# Altium PCB MB.PcbDoc (part 1 of 3)
Units mil, origin at the board's own origin, x right, y up, seen from the top; angles counter-clockwise.
Board outline 5718.69 x 3947.04 mil, 2 copper layers (Top Layer, Bottom Layer); 146 components, 154 nets, 660 pads, 249 vias.
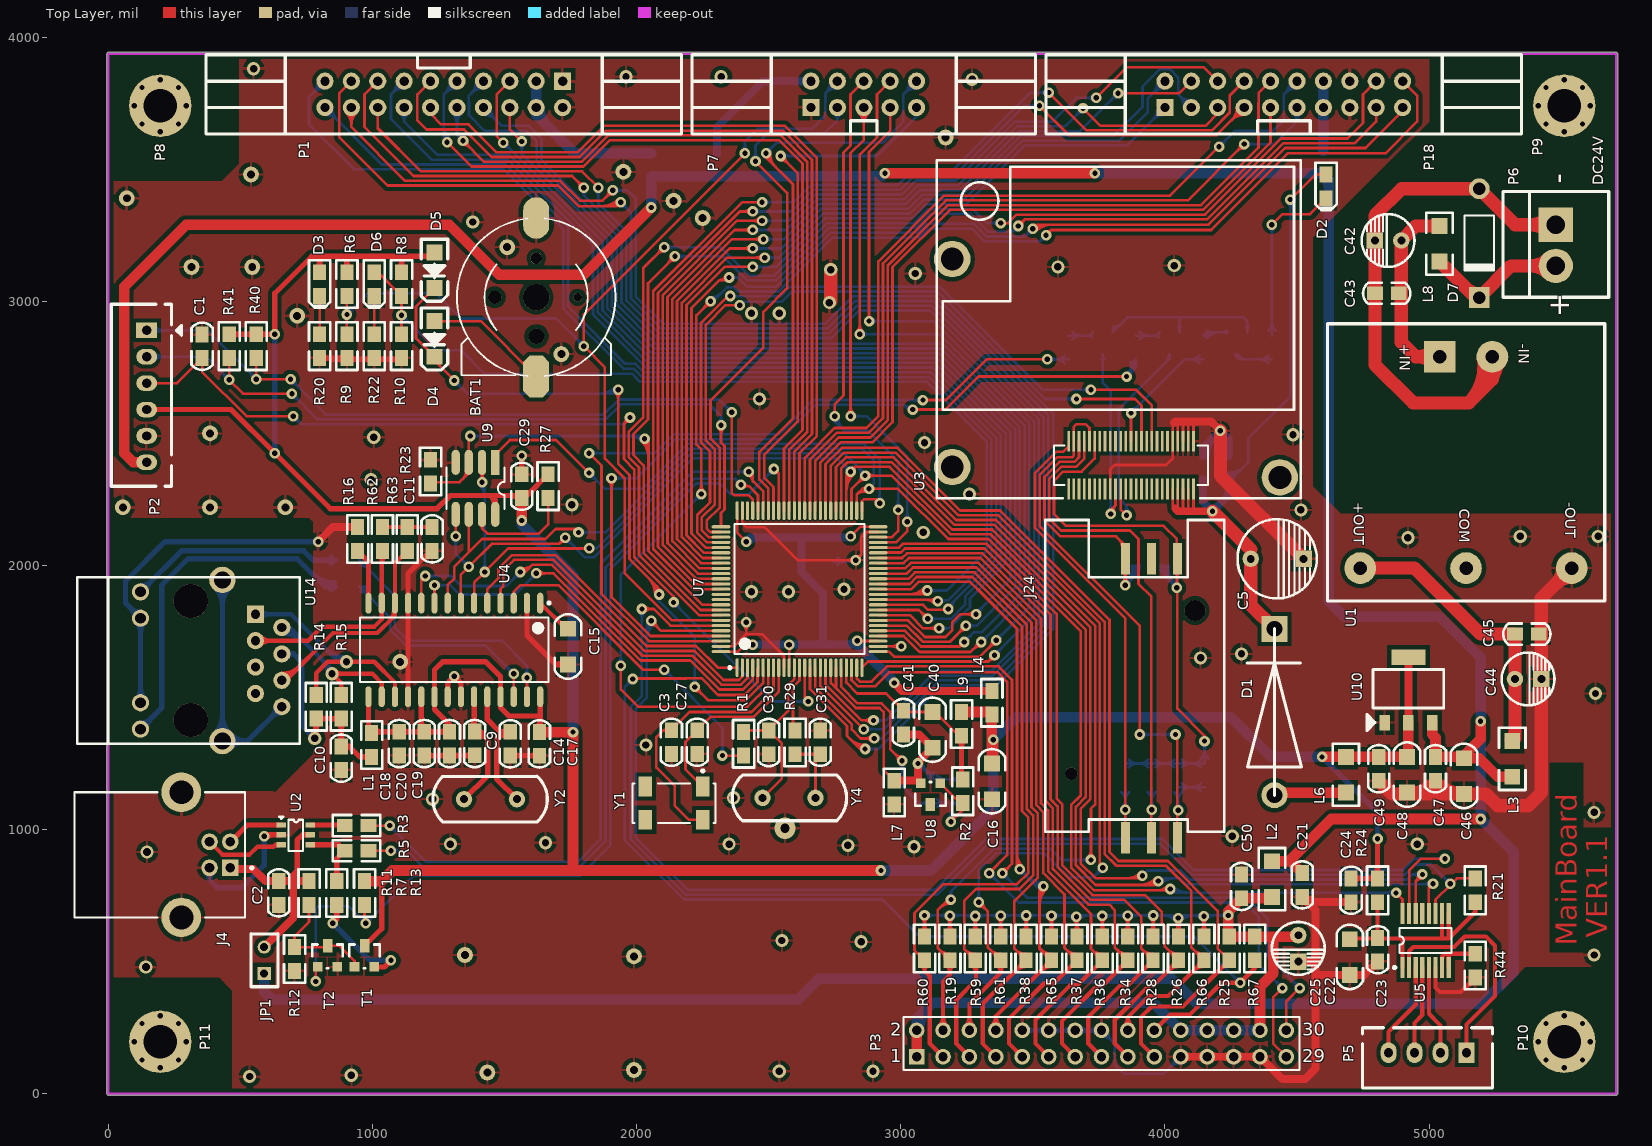
[diagram p0: Top Layer view]
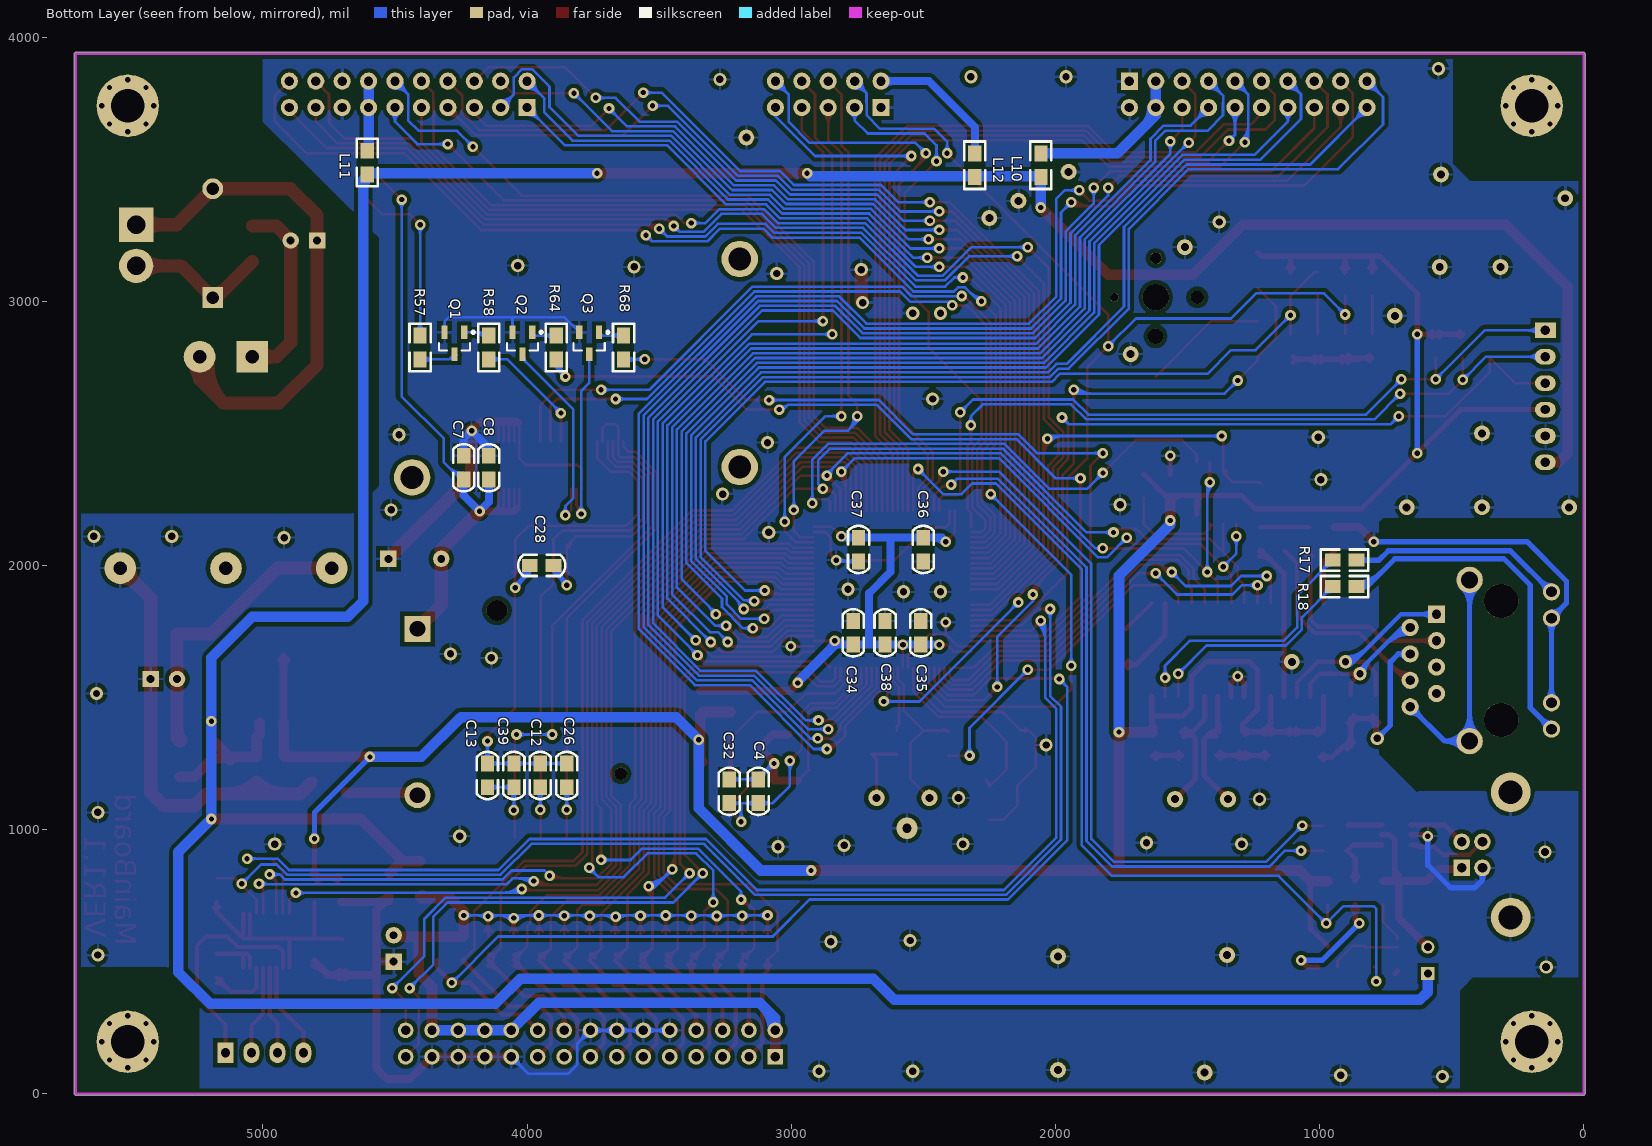
[diagram p1: Bottom Layer view, seen from below]

## Layer stack, top to bottom
Top Layer: signal copper 1.4
Dielectric: dielectric 12.6, FR-4, Dk 4.8
Bottom Layer: signal copper 1.4

## Board outline
-5.01,0 ccw(c0,0) 0,-5.01 5708.66,-5.01 ccw(c5708.66,0) 5713.68,0 5713.68,3937.01 ccw(c5708.66,3937.01) 5708.66,3942.02 0,3942.02 ccw(c0,3937.01) -5.01,3937.01

## Design rules (kind name [scope] priority, off if disabled: settings)
Clearance Clearance_1 [(InComponent('U7') AND HasFootprint('LQFP100_N'))] p1: gap=6
Clearance Clearance_2 [IsRegion] p2: gap=16
Clearance [All] p3: gap=8
ComponentClearance [All] p1: gap=0 collisioncheckmode=3 verticalgap=10 showdistances=FALSE
PolygonConnect [All] p1: connectstyle=Relief reliefconductorwidth=10 reliefentries=4 polygonreliefangle="90 Angle"
RoomDefinition POWER [InComponentClass('POWER')] p1 off: confinementstyle=ConfineIn formatcopy=TRUE lockcomponents=FALSE outline 618.67,3195.12 5382.45,3195.12 5382.45,3943.15 618.67,3943.15
RoomDefinition stm32 [InComponentClass('stm32')] p2 off: confinementstyle=ConfineIn formatcopy=TRUE lockcomponents=FALSE outline 1732.25,885.83 3931.89,885.83 3931.89,3665.04 1732.25,3665.04
RoomDefinition lcd_key_led [InComponentClass('lcd_key_led')] p3 off: confinementstyle=ConfineIn formatcopy=TRUE lockcomponents=FALSE outline 3917.29,866.14 5669.29,866.14 5669.29,2893.68 3917.29,2893.68
RoomDefinition EtherNet [InComponentClass('EtherNet')] p4 off: confinementstyle=ConfineIn formatcopy=TRUE lockcomponents=FALSE outline 492.09,2795.28 1751.97,2795.28 1751.97,3917.31 492.09,3917.31
RoomDefinition GSM [InComponentClass('GSM')] p5: confinementstyle=ConfineIn formatcopy=TRUE lockcomponents=FALSE outline 3120.1,2243.71 3120.1,3541.02 4520.9,3541.02 4520.9,3532 4657,3532 4657,1452 4712,1452 4712,1203 4525.36,1203 4525.36,1074.87 4231.02,1074.87 4231.02,903.88 3539.85,903.88 3539.85,2243.71
RoutingVias [All] p1: holewidth=28 width=40 viastyle="Through Hole" minholewidth=20 minwidth=40 maxholewidth=20 maxwidth=50
SilkscreenOverComponentPads [All] p1: minsilkscreentomaskgap=10
SolderMaskExpansion [All] p1: expansion=4
Width [All] p1: maxlimit=100 minlimit=10 preferedwidth=10
26 further rules are at their usual default settings.

## Classes and differential pairs
component class EtherNet: C9 C10 C11 C14 C15 C16 C17 C18 C19 C20 L1 R1 R14 R15 R16 R17 R18 R62 R63 U4 U14 Y2
component class GSM: C5 C7 C8 C12 C13 C26 C28 C39 D1 D2 J24 L6 Q1 Q2 Q3 R57 R58 R64 R68 U3
component class lcd_key_led: C2 C21 C22 C23 C24 C25 C50 D3 D6 J4 JP1 L2 P3 P5 R3 R5 R7 R11 R12 R13 R19 R20 R21 R22 R24 R25 R26 R28 R34 R36 R37 R38 R44 R59 R60 R61 R65 R66 R67 T1 T2 U2 U5
component class POWER: C42 C43 C44 C45 C46 C47 C48 C49 D7 L3 L8 P6 P8 P9 P10 P11 U1 U10
component class stm32: BAT1 C1 C3 C4 C27 C29 C30 C31 C32 C34 C35 C36 C37 C38 C40 C41 D4 D5 L4 L7 L9 L10 L11 L12 P1 P2 P7 P18 R2 R6 R8 R9 R10 R23 R27 R29 R40 R41 U7 U8 U9 Y1 Y4

## Components (designator, comment, footprint, x,y, rotation, side; value= is the part's Value field where it differs from the comment)
BAT1 "3V" battery 1620,2715 r180 top
C1 "100nF" C0805 355,2874.83 r270 top
C2 "100nF" C0805 645,715 r90 top
C3 "10pF" C0805 2131.89,1376.04 r270 top
C4 "100nF" C0805 3125,1190 r270 bottom
C5 "470uF/16V" CD2/3 4525,2025 r270 top
C7 "100nF" C0805 4240,2415 r270 bottom
C8 "100nF" C0805 4145,2415 r270 bottom
C9 "22pF" C0805 1386.89,1371.04 r270 top
C10 "100nF" C0805 881.89,1225.04 r90 top
C11 "10nF" C0805 1225.89,2055.04 r90 top
C12 "1nF" C0805 3950,1250 r270 bottom
C13 "100nF" C0805 4150,1250 r270 bottom
C14 "22pF" C0805 1521.89,1370.04 r270 top
C15 "10uF" C1206 1740,1625 r90 top
C16 "10uF" C1206 3345,1115 r90 top
C17 "100nF" C0805 1631.89,1279.21 r90 top
C18 "100nF" C0805 1101.14,1280.21 r90 top
C19 "100nF" C0805 1291.64,1280.21 r90 top
C20 "100nF" C0805 1196.39,1280.21 r90 top
C21 "100nF" C0805 4520,745 r90 top
C22 "10uF" C1206 4700,450 r90 top
C23 "100nF" C0805 4805,500 r90 top
C24 "100nF" C0805 4705,725 r90 top
C25 "47uF/16V" CD1/2 4505,500 r180 top
C26 "22pF" C0805 3850,1250 r270 bottom
C27 "10pF" C0805 2229.22,1376.04 r270 top
C28 "22pF" C0805 3990,2000 r180 bottom
C29 "100nF" C0805 1565,2345 r270 top
C30 "22pF" C0805 2500,1375 r270 top
C31 "22pF" C0805 2695,1285 r90 top
C32 "100nF" C0805 3235,1190 r270 bottom
C34 "100nF" C0805 2765,1790 r270 bottom
C35 "100nF" C0805 2510,1790 r270 bottom
C36 "100nF" C0805 2500,2015 r90 bottom
C37 "100nF" C0805 2745,2015 r90 bottom
C38 "100nF" C0805 2645,1790 r270 bottom
C39 "22pF" C0805 4050,1250 r270 bottom
C40 "10uF" C1206 3120,1310 r90 top
C41 "10nF" C0805 3010,1360 r90 top
C42 "47uF/50V" CD1/2 4795,3230 r90 top
C43 "100nF" C0805 4885,3030 r180 top
C44 "47uF/16V" CD1/2 5425,1570 r270 top
C45 "100nF" C0805 5325,1740 r0 top
C46 "10uF" C1206 5131.89,1135.04 r90 top
C47 "100nF" C0805 5024.39,1185.04 r90 top
C48 "10uF" C1206 4916.89,1140.04 r90 top
C49 "100nF" C0805 4809.39,1185.04 r90 top
C50 "100nF" C0805 4290,830 r270 top
D1 "1N5822" V5 4415,1130.08 r90 top
D2 "LED" LED0805#1 4610,3480 r270 top
D3 "POWER" LED0805#2 800,3020 r270 top
D4 "LL4148" D1206 1235,2925 r270 top
D5 "LL4148" D1206 1235,3185 r270 top
D6 "WORK" LED0805#2 1006.67,3020 r270 top
D7 "1N4007" DO-41 5190,3220 r270 top
J4 "USB-B" USB-B 461.89,855.04 r180 top
J24 "SIM" IC-CARD2 4046.85,968.94 r90 top
JP1 "" SIP2 590,455 r90 top
L1 "BLM21PG331SN1" L0805 996.89,1365.04 r270 top
L2 "BLM31PG601SN1" l1206 4405,745 r90 top
L3 "BLM31PG601SN1" L1206 5315,1200 r90 top
L4 "BLM21PG331SN1" L0805 3345,1435 r90 top
L6 "BLM31PG601SN1" L1206 4685,1275 r270 top
L7 "BLM21PG331SN1" L0805 2975,1095 r90 top
L8 "BLM31PG601SN1" L1206 5040,3285 r270 top
L9 "BLM21PG331SN1" L0805 3230,1445 r270 top
L10 "BLM21PG331SN1" L0805 2055,3470 r90 bottom
L11 "BLM21PG331SN1" L0805 4605,3480 r90 bottom
L12 "BLM21PG331SN1" L0805 2305,3470 r90 bottom
P1 "HV_CTRL" IDC20-EJ 1720,3833.15 r180 top
P2 "Header 6" TJC3-6A 145,2890 r270 top
P3 "LCD NH056DN03" HDR2X15 3060,140 r0 top
P5 "Touch Screen" TJC3-4A 5141.89,155.04 r180 top
P6 "24V" 3.96-2 5480,3290 r90 top
P7 "USART" IDC10-EJ 2660,3733.15 r0 top
P8 "Header 9" lk 196.85,3740.16 r0 top
P9 "Header 9" lk 5511.81,3740.16 r0 top
P10 "Header 9" lk 5511.81,196.85 r0 top
P11 "Header 9" lk 196.85,196.85 r0 top
P18 "RELAY" IDC20-EJ 4000,3733.15 r0 top
Q1 "MMBT3904" SOT23_N 4275,2841.34 r270 bottom
Q2 "MMBT3904" SOT23_N 4017.6,2841.26 r270 bottom
Q3 "MMBT3904" SOT23_N 3765,2841.26 r270 bottom
R1 "0R" R0805 2405,1370 r270 top
R2 "1K" R0805 3235,1190 r270 top
R3 "0R" R0805 985,1015 r180 top
R5 "0R" R0805 985,920 r180 top
R6 "NI" R0805 903.33,3110 r270 top
R7 "1.5K" R0805 865,805 r270 top
R8 "NI" R0805 1110,3110 r270 top
R9 "100K" R0805 903.33,2875 r270 top
R10 "1K" R0805 1110,2875 r270 top
R11 "10K" R0805 760,715 r90 top
R12 "36K" R0805 705,465 r90 top
R13 "36K" R0805 970,715 r90 top
R14 "49.9/1%" R0805 786.89,1420.04 r90 top
R15 "49.9/1%" R0805 881.89,1420.04 r90 top
R16 "2K/1%" R0805 943.89,2145.04 r270 top
R17 "390" R0805 860,2020 r0 bottom
R18 "390" R0805 860,1920 r0 bottom
R19 "5.1K" R0805 3186.15,595 r270 top
R20 "1K" R0805 800,2875 r270 top
R21 "100K" R0805 5175,815 r270 top
R22 "1K" R0805 1006.67,2875 r270 top
R23 "10K" R0805 1220,2310 r90 top
R24 "100" R0805 4805,725 r90 top
R25 "5.1K" R0805 4243.85,595 r270 top
R26 "5.1K" R0805 4051.54,595 r270 top
R27 "10K" R0805 1665,2255 r90 top
R28 "5.1K" R0805 3955.38,595 r270 top
R29 "390" R0805 2600,1375 r270 top
R34 "5.1K" R0805 3859.23,595 r270 top
R36 "5.1K" R0805 3763.08,595 r270 top
R37 "5.1K" R0805 3666.92,595 r270 top
R38 "5.1K" R0805 3474.62,595 r270 top
R40 "100K" R0805 560,2785 r90 top
R41 "100K" R0805 457.5,2785 r90 top
R44 "1K" R0805 5175,440 r90 top
R57 "3.3K" R0805 4405,2780 r90 bottom
R58 "10K" R0805 4145,2780 r90 bottom
R59 "5.1K" R0805 3282.31,595 r270 top
R60 "5.1K" R0805 3090,595 r270 top
R61 "5.1K" R0805 3378.46,595 r270 top
R62 "49.9/1%" R0805 1037.89,2145.04 r270 top
R63 "49.9/1%" R0805 1131.89,2145.04 r270 top
R64 "10K" R0805 3890,2780 r90 bottom
R65 "5.1K" R0805 3570.77,595 r270 top
R66 "5.1K" R0805 4147.69,595 r270 top
R67 "5.1K" R0805 4340,595 r270 top
R68 "10K" R0805 3635,2780 r90 bottom
T1 "MMBT3904" SOT-23 932,480 r0 top
T2 "MMBT3904" SOT-23 792,480 r0 top
U1 "MORNSUN PWB2405YMD-6W" DC/DC-1X1 5040,2790 r270 top
U2 "USBLC6-2SC6" SOT-23/6 654.76,1017.4 r0 top
U3 "MC37I" MC37I 3635.56,2470.19 r90 top locked
U4 "ENC28J60-I/SO" SOIC-SO28_L 1309.84,1680.08 r270 top
U5 "ADS7843E" DBQ016 4986.89,580.04 r0 top
U7 "STM32F103VBT6" LQFP100_N 2616.89,1910.04 r90 top
U8 "LM4040BIM3-2.5/SOT23" SOT-23 3150,1175 r180 top
U9 "M25P40VMN6T" SO8 1465,2390 r270 top
U10 "LM1117MPX-3.3" SOT-223 4921.89,1405.04 r0 top
U14 "HR911105A" HANRUN-A8 311.89,1865.04 r270 top
Y1 "32.768KHz" DSO-N4 2141.89,1100.04 r180 top
Y2 "25MHz" CRYSTAL2 1346.89,1115.04 r0 top
Y4 "8MHz" CRYSTAL2 2676.89,1120.04 r180 top

## Footprints (in the part's own frame and the unit in brackets; to place one, negate y for a bottom-side part, rotate by r counter-clockwise, add the part's x,y. Pads: shape width x height; smd on the part's side, far side on the other; paste and mask are expansions set on the pad)
3.96-2 [mil]
  rect 130x130 hole 70: 1(0,0)
  round 130 hole 70: 2(-156,0)
  silkscreen extent -275,-200 125,200
battery [mm]
  round 0.813 hole 0.813: 0(-3.988,-7.62)
  round 1.5 hole 1.5: 0(-0.025,-3.87)
  round 2.54 hole 2.54: 0(0,-7.62)
  round 1.1 hole 1.1: 0(0,-11.37)
  round 1.27 hole 1.27: 0(3.988,-7.62)
  oct 2.5x4 smd: 1(0,0)
  oval 2.5x4 smd: 2(0,-15.24)
  silkscreen extent -7.62,-15.19 7.62,-0.05
C0805 [mil]
  rect 60x50 smd: 1(0,0) 2(90,0)
  silkscreen extent -44,-40 135,40
C1206 [mil]
  rect 60x60 smd: 1(0,0) 2(135,0)
  silkscreen extent -54,-50 190,50
CD1/2 [mil]
  round 62 hole 30: 1(0,-100)
  rect 62x62 hole 30: 2(0,0)
  silkscreen extent -100,-150 100,50
CD2/3 [mil]
  round 62 hole 30: 1(0,-200)
  rect 62x62 hole 30: 2(0,0)
  silkscreen extent -150,-250 150,50
CRYSTAL2 [mil]
  round 62 hole 30: 1(0,0) 2(200,0)
  silkscreen extent -118,-87 315,87
D1206 [mil]
  rect 60x60 smd: 1(0,0) 2(135,0)
  silkscreen extent -50,-50 185,50
DBQ016 [mm] "SSOP; 16 Leads; Body Width 3.9 mm; Pitch 0.635 mm"
  rect 0.4x2 smd: 1(-2.222,-2.6) 2(-1.587,-2.6) 3(-0.953,-2.6) 4(-0.318,-2.6) 5(0.318,-2.6) 6(0.953,-2.6) 7(1.587,-2.6) 8(2.222,-2.6) 9(2.222,2.6) 10(1.587,2.6) 11(0.953,2.6) 12(0.318,2.6) 13(-0.318,2.6) 14(-0.953,2.6) 15(-1.587,2.6) 16(-2.222,2.6)
  silkscreen extent -3.1,-2.72 2.5,1.2
DC/DC-1X1 [mil]
  rect 120x120 hole 51: 1(0,0)
  round 120 hole 51: 2(0,200) 3(800,500) 4(800,100) 5(800,-300)
  silkscreen extent -125,-425 925,625
DO-41 [mm] "Diode, Axial; Body 5.2 x 2.7 mm (LxDia. max), Lead Dia. 0.86 mm (max)"
  round 2 hole 1.2: 1(-5.23,0)
  rect 2x2 hole 1.2: 2(5.23,0)
  silkscreen extent -2.65,-1.4 2.75,1.4
DSO-N4 [mm] "Crystal, SM; 4 Leads; Body 8 x 3.8 x 2.5 mm (LxWxH)"
  rect 1.3x1.9 smd: 1(-2.75,-1.6) 2(2.75,-1.6) 3(2.75,1.6) 4(-2.75,1.6)
  silkscreen extent -4,-3.22 4,1.9
HANRUN-A8 [mil]
  rect 65x65 hole 35: 1(50,245)
  round 65 hole 35: 2(100,345) 3(150,245) 4(200,345) 5(250,245) 6(300,345) 7(350,245) 8(400,345)
  round 65 hole 40: 9(-35.04,-189.92) 10(64.96,-189.92) 11(384.96,-189.92) 12(484.96,-189.92)
  round 100 hole 65: 13(-80,120) 14(530,120)
  round 130 hole 130: A(0,0) B(450,0)
  silkscreen extent -90,-430 540,413
HDR2X15 [mm] "Connector; Header; 15x2 Position"
  rect 1.5x1.5 hole 0.9: 1(0,0)
  round 1.5 hole 0.9: 2(0,2.54) 3(2.54,0) 4(2.54,2.54) 5(5.08,0) 6(5.08,2.54) 7(7.62,0) 8(7.62,2.54) 9(10.16,0) 10(10.16,2.54) 11(12.7,0) 12(12.7,2.54) 13(15.24,0) 14(15.24,2.54) 15(17.78,0) 16(17.78,2.54) 17(20.32,0) 18(20.32,2.54) 19(22.86,0) 20(22.86,2.54) 21(25.4,0) 22(25.4,2.54) 23(27.94,0) 24(27.94,2.54) 25(30.48,0) 26(30.48,2.54) 27(33.02,0) 28(33.02,2.54) 29(35.56,0) 30(35.56,2.54)
  silkscreen extent -1.27,-1.27 36.83,3.81
IC-CARD2 [mm]
  round 1.2 hole 1.2: 0(6.162,10.2)
  round 2 hole 2: 0(21.862,-1.7)
  rect 3x0.864 smd: 1(0,0) 2(0,2.5) 3(0,5) 4(26.824,0) 5(26.824,2.5) 6(26.824,5)
  silkscreen extent 0.56,-4.5 30.56,12.7
IDC10-EJ [mil]
  rect 65x65 hole 35: 1(0,0)
  round 65 hole 35: 2(0,100) 3(100,0) 4(100,100) 5(200,0) 6(200,100) 7(300,0) 8(300,100) 9(400,0) 10(400,100)
  silkscreen extent -450,-100 850,200
IDC20-EJ [mil]
  rect 65x65 hole 35: 1(0,0)
  round 65 hole 35: 2(0,100) 3(100,0) 4(100,100) 5(200,0) 6(200,100) 7(300,0) 8(300,100) 9(400,0) 10(400,100) 11(500,0) 12(500,100) 13(600,0) 14(600,100) 15(700,0) 16(700,100) 17(800,0) 18(800,100) 19(900,0) 20(900,100)
  silkscreen extent -450,-100 1350,200
L0805 [mil]
  rect 60x50 smd: 1(0,0) 2(90,0)
  silkscreen extent -45,-40 135,40
l1206 [mil]
  rect 60x60 smd: 1(0,0) 2(135,0)
  silkscreen extent -50,-50 185,50
L1206 [mil]
  rect 60x60 smd: 1(0,0) 2(135,0)
  silkscreen extent -50,-50 185,50
LED0805#1 [mil]
  rect 60x50 smd: 1(0,0) 2(90,0)
  silkscreen extent -45,-40 135,40
LED0805#2 [mil]
  rect 60x50 smd: 1(-90,0) 2(0,0)
  silkscreen extent -135,-40 45,40
lk [mm]
  round 6 hole 3.2: 1(0,0)
  round 1 hole 0.5: 2(-2.5,0) 3(0,2.5) 4(2.5,0) 5(0,-2.5) 6(-1.75,-1.75) 7(1.75,-1.75) 8(1.75,1.75) 9(-1.75,1.75)
LQFP100_N [mm] "Thin QFP, 100-Leads, Body 14x14mm, Pitch 0.5mm, IPC Medium Density"
  oval 1.8x0.3 smd: 1(-7.55,6) 2(-7.55,5.5) 3(-7.55,5) 4(-7.55,4.5) 5(-7.55,4) 6(-7.55,3.5) 7(-7.55,3) 8(-7.55,2.5) 9(-7.55,2) 10(-7.55,1.5) 11(-7.55,1) 12(-7.55,0.5) 13(-7.55,0) 14(-7.55,-0.5) 15(-7.55,-1) 16(-7.55,-1.5) 17(-7.55,-2) 18(-7.55,-2.5) 19(-7.55,-3) 20(-7.55,-3.5) 21(-7.55,-4) 22(-7.55,-4.5) 23(-7.55,-5) 24(-7.55,-5.5) 25(-7.55,-6) 51(7.55,-6) 52(7.55,-5.5) 53(7.55,-5) 54(7.55,-4.5) 55(7.55,-4) 56(7.55,-3.5) 57(7.55,-3) 58(7.55,-2.5) 59(7.55,-2) 60(7.55,-1.5) 61(7.55,-1) 62(7.55,-0.5) 63(7.55,0) 64(7.55,0.5) 65(7.55,1) 66(7.55,1.5) 67(7.55,2) 68(7.55,2.5) 69(7.55,3) 70(7.55,3.5) 71(7.55,4) 72(7.55,4.5) 73(7.55,5) 74(7.55,5.5) 75(7.55,6)
  oval 0.3x1.8 smd: 26(-6,-7.55) 27(-5.5,-7.55) 28(-5,-7.55) 29(-4.5,-7.55) 30(-4,-7.55) 31(-3.5,-7.55) 32(-3,-7.55) 33(-2.5,-7.55) 34(-2,-7.55) 35(-1.5,-7.55) 36(-1,-7.55) 37(-0.5,-7.55) 38(0,-7.55) 39(0.5,-7.55) 40(1,-7.55) 41(1.5,-7.55) 42(2,-7.55) 43(2.5,-7.55) 44(3,-7.55) 45(3.5,-7.55) 46(4,-7.55) 47(4.5,-7.55) 48(5,-7.55) 49(5.5,-7.55) 50(6,-7.55) 76(6,7.55) 77(5.5,7.55) 78(5,7.55) 79(4.5,7.55) 80(4,7.55) 81(3.5,7.55) 82(3,7.55) 83(2.5,7.55) 84(2,7.55) 85(1.5,7.55) 86(1,7.55) 87(0.5,7.55) 88(0,7.55) 89(-0.5,7.55) 90(-1,7.55) 91(-1.5,7.55) 92(-2,7.55) 93(-2.5,7.55) 94(-3,7.55) 95(-3.5,7.55) 96(-4,7.55) 97(-4.5,7.55) 98(-5,7.55) 99(-5.5,7.55) 100(-6,7.55)
  silkscreen extent -7.67,-6.25 6.25,6.82, body extent -7,-7 7,7, height 1.6
MC37I [mm]
  rect 2x0.254 smd: 1(0,0) 2(0,-0.5) 3(0,-1) 4(0,-1.5) 5(0,-2) 6(0,-2.5) 7(0,-3) 8(0,-3.5) 9(0,-4) 10(0,-4.5) 11(0,-5) 12(0,-5.5) 13(0,-6) 14(0,-6.5) 15(0,-7) 16(0,-7.5) 17(0,-8) 18(0,-8.5) 19(0,-9) 20(0,-9.5) 21(0,-10) 22(0,-10.5) 23(0,-11) 24(0,-11.5) 25(0,-12) 26(-4.6,-12) 26(-4.6,-12) 27(-4.6,-11.5) 28(-4.6,-11) 29(-4.6,-10.5) 30(-4.6,-10) 31(-4.6,-9.5) 32(-4.6,-9) 33(-4.6,-8.5) 34(-4.6,-8) 35(-4.6,-7.5) 36(-4.6,-7) 37(-4.6,-6.5) 38(-4.6,-6) 39(-4.6,-5.5) 40(-4.6,-5) 41(-4.6,-4.5) 42(-4.6,-4) 43(-4.6,-3.5) 44(-4.6,-3) 45(-4.6,-2.5) 46(-4.6,-2) 47(-4.6,-1.5) 48(-4.6,-1) 49(-4.6,-0.5) 50(-4.6,0)
  round 3.5 hole 2.2: A(-2.479,11.19) B(17.521,11.19) C(-3.479,-20.31)
  silkscreen extent -5.48,-22.31 27.02,12.69
R0805 [mil]
  rect 60x50 smd: 1(0,0) 2(90,0)
  silkscreen extent -45,-40 135,40
SIP2 [mil]
  rect 50x50 hole 30: 1(0,0)
  round 50 hole 30: 2(100,0)
  silkscreen extent -50,-52 151,50
SO8 [mm]
  rect 2.4x0.8 smd: 1(0,0)
  oval 2.4x0.8 smd: 2(0,-1.27) 3(0,-2.54) 4(0,-3.81) 5(5,-3.81) 6(5,-2.54) 7(5,-1.27) 8(5,0)
  silkscreen extent 0.5,-4.7 4.5,0.89
SOIC-SO28_L [mm] "SOIC, 28-Leads, Body 17.9x7.5mm, Pitch 1.27mm, IPC High Density"
  oval 2x0.6 smd: 1(-4.5,8.255) 2(-4.5,6.985) 3(-4.5,5.715) 4(-4.5,4.445) 5(-4.5,3.175) 6(-4.5,1.905) 7(-4.5,0.635) 8(-4.5,-0.635) 9(-4.5,-1.905) 10(-4.5,-3.175) 11(-4.5,-4.445) 12(-4.5,-5.715) 13(-4.5,-6.985) 14(-4.5,-8.255) 15(4.5,-8.255) 16(4.5,-6.985) 17(4.5,-5.715) 18(4.5,-4.445) 19(4.5,-3.175) 20(4.5,-1.905) 21(4.5,-0.635) 22(4.5,0.635) 23(4.5,1.905) 24(4.5,3.175) 25(4.5,4.445) 26(4.5,5.715) 27(4.5,6.985) 28(4.5,8.255)
  silkscreen extent -4.62,-9.05 3.1,9.23, body extent -3.8,-9.06 3.8,9.06, height 2.65
SOT23_N [mm] "SOT23, 3-Leads, Body 2.9x1.3mm, Pitch 0.95mm, Lead Span 2.3mm, IPC Medium Density"
  rect 1.3x0.6 smd: 1(-1.05,0.95) 2(-1.05,-0.95) 3(1.05,0)
  silkscreen extent -1.17,-1.5 0.7,1.92, body extent -0.7,-1.5 0.7,1.5, height 1.1
SOT-23 [mil]
  rect 36x36 smd: 1(0,0) 2(75,0)
  rect 36x50 smd: 3(38,80)
  silkscreen extent -20,-5 95,85
SOT-23/6 [mm]
  rect 0.9x0.5 smd: 1(0,0) 2(0,-0.95) 3(0,-1.9) 4(2.8,-1.9) 5(2.8,-0.95) 6(2.8,0)
  silkscreen extent -0.2,-2.5 2.1,0.8
SOT-223 [mm]
  rect 1x1.5 smd: 1(-2.286,0) 2(0,0) 3(2.286,0)
  rect 3.3x1.5 smd: 4(0,6.299)
  silkscreen extent -4,-0.8 3.4,5.1
TJC3-4A [mm]
  rect 1.5x2 hole 0.9: 1(0,0)
  oval 1.5x2 hole 0.9: 2(2.5,0) 3(5,0) 4(7.5,0)
  silkscreen extent -2.5,-2.4 10,3.4
TJC3-6A [mm]
  rect 1.5x2 hole 0.9: 1(0,0)
  oval 1.5x2 hole 0.9: 2(2.54,0) 3(5.08,0) 4(7.62,0) 5(10.16,0) 6(12.7,0)
  silkscreen extent -2.5,-3.4 15,3.35
USB-B [mm]
  rect 1.6x1.6 hole 0.92: 1(0,0)
  round 1.6 hole 0.92: 2(0,-2.5) 3(2,-2.5) 4(2,0)
  round 3.8 hole 2.3: 5(4.71,4.77) 6(4.71,-7.27)
  silkscreen extent -2.18,-7.27 14.99,4.77
V5 [mm]
  round 2.5 hole 1.5: 1(0,0)
  rect 2.5x2.5 hole 1.5: 2(16,0)
  silkscreen extent 0,-2.6 16,2.64

## Part data
C1 C2 C3 C9 C10 C11 C14 C15 C16 C17 C18 C19 C20 C21 C22 C23 C24 C27 C30 C31 C32 C34 C35 C36 C37 C38 C40 C41 C46 C47 C48 C49 C50: library part CAP, "C"
C4 C7 C8 C12 C13 C26 C28 C29 C39: library part Cap, "C"
C5 C25: library part "Cap Pol1", "Polarized Capacitor (Rad"
C42 C44: library part CD1, "Electrolytic Capac"
C43 C45: library part CC, "C"
D1: library part 2JG, "D"
D3 D6: library part LED0, "Typical INFRARED"
D4 D5: library part Diode, "Defau"
D7: library part "Diode 1N4007", "1 Amp General Purpose Rectifier"
J4: library part USB
J24: library part CO
JP1: library part J
L3 L8: library part I
P1 P18: library part "Header 10X2", "Header, 10-Pin, Dual r"
P2: "Header, 6-P"
P3: library part "Header 15X2", "Header, 15-Pin, Dual row"
P5: library part "Header 4", "Header, 4-P"
P6: library part "Header 2", "Header, 2-P"
P7: library part "Header 5X2", "Header, 5-Pin, Dual r"
P8 P9 P10 P11: "Header, 9-P"
Q1 Q2 Q3: "NPN Switching Transistor"
R1 R3 R5 R7 R11 R12 R13 R14 R15 R16 R17 R18 R19 R20 R21 R22 R24 R25 R26 R27 R28 R29 R34 R36 R37 R38 R40 R41 R44 R59 R60 R61 R62 R63 R65 R66 R67: library part Res1
R2 R6 R8 R9 R10 R23: library part res1
R57 R58 R64 R68: library part Res2
T1 T2: library part N
U4: library part ENC28J60/SO, "Stand-Alone Ethernet Controller with SPI Interface, 28-Pin SOIC"
U5: "4-Wire Touch Screen Controller, 16-Pin SSOP, Pb-Free"
U7: "STM32 ARM-based 32-bit MCU with 64 Kbytes Flash, 100-pin LQFP, Industrial Temperature"
U8: library part LM40
U9: library part SPI_FLASH
U10: library part LM1117, "3-Terminal Adjustable Positive V"
U14: "RJ45 Connector with Integrated Magneti"
Y1: library part ECS-35-17-7S, "Crystal Oscillator"
Y2 Y4: library part CRYSTAL, "Cry"

## Free pads (board coordinates)
  round 60 hole 30: 0(1990,90) 1(1435,80) 2(1350,525) 3(1990,520) 4(3170,3620) 5(2250,3315) 6(2140,3380) 7(1950,3490) 8(70,3390) 9(540,3480) 10(315,3130) 11(545,3130) 12(55,2220) 13(385,2220) 14(670,2220) 15(385,2500) 16(715,2945) 17(1715,2800) 18(1510,3205) 19(1105,1635)

## Via types
v1: diameter 40, hole 20, Top Layer to Bottom Layer, 190 vias
v2: diameter 50, hole 28, Top Layer to Bottom Layer, 49 vias
v3: diameter 40, hole 22, Top Layer to Bottom Layer, 5 vias
v4: diameter 50, hole 30, Top Layer to Bottom Layer, 4 vias
v5: diameter 80, hole 35, Top Layer to Bottom Layer, 1 vias

## Nets (pads, with @x,y where several pads share a name; then routed paths per layer and width w, separated by ;. In a path a pad name is that pad's centre, name@x,y a point inside that pad or via, vN(x,y) a via of type N, cw(c..) or ccw(c..) an arc to the next point about the centre after c; other vN are vias at no path point)
+24V: D7.2 L8.2 P6.2 | length 751.6
  Top Layer w50: L8.2@5040,3150 5175.91,3014.09 D7.2@5190,3014.09 5309.91,3134 P6.2@5480,3134 ; 5141.41,3048.59 ccw(c5190,3097.18) D7.2@5190,3028.46 ; P6.2@5451.72,3105.72 ccw(c5383.43,3037.43) 5383.43,3134 ccw(c5383.43,3230.57) P6.2@5451.72,3162.28
AGND: C4.1 C32.1 C40.1 C41.1 L7.2 U7.19 U7.20 U8.2 | length 1637.9
  Top Layer w10: U7.19@2735,1612.8 2735,1554.69 2754.69,1535 ; U7.20@2754.69,1612.8 2754.69,1535 ; 2934,1226 2935,1225 ; L7.2@2975,1185 2935,1225 ; v1(3065,1250) v1@3065,1255 ; 2754.69,1535 2829.69,1460 2920,1460 2935,1445 2935,1225
  Top Layer w30: L7.2@2975,1185 3065,1185 v1(3065,1250) ; C41.1@3010,1360 3070,1360 C40.1@3120,1310 v1@3065,1255 ; v1@3070,1250 cw(c3094.14,1250) 3077.07,1267.07
  Bottom Layer w10: v1@3065,1235 cw(c3065,1198.79) 3090.61,1224.39 cw(c3116.21,1250) v1@3080,1250 ; v1(3065,1250) C4.1@3125,1190 C32.1@3235,1190 ; v1@3068.88,1235.51 cw(c3072.65,1221.44) 3079.94,1234.06 ; v1@3069.83,1251.29 ccw(c3102.4,1260.02) 3085.54,1230.82 ; v1@3079.49,1253.88 ccw(c3135.38,1268.86) C4.1@3106.45,1218.75 ; 3082.32,1232.68 ccw(c3125,1275.36) C4.1@3125,1215 ; 3094.39,1220.61 cw(c3068.79,1195) C4.1@3105,1195 ; 3099.39,1215.61 ccw(c3125,1241.21) C4.1@3125,1205 ; C4.1@3139.14,1175.86 cw(c3173.28,1141.72) 3173.28,1190 cw(c3173.28,1238.28) C4.1@3139.14,1204.14 ; C32.1@3220.86,1175.86 ccw(c3186.72,1141.72) 3186.72,1190 ccw(c3186.72,1238.28) C32.1@3220.86,1204.14
AVREF: C4.2 C32.2 R2.2 U7.21 U8.1 | length 1507.9
  Top Layer w10: U7.21@2774.37,1612.8 2774.37,1540.77 2837.14,1478 2927.46,1478 2960,1445.46 2960,1305 v1(3005,1260) ; v1@2990,1260 ccw(c2953.79,1260) 2979.39,1285.61 ccw(c3005,1311.21) v1@3005,1275 ; U8.1@3150,1175 3225,1100 R2.2@3235,1100 3235,1075 v1(3190,1030)
  Bottom Layer w10: v1@2994.39,1249.39 cw(c2968.79,1223.79) 3005,1223.79 cw(c3041.21,1223.79) v1@3015.61,1249.39 ; v1(3005,1260) 3005,1165 3070,1100 C4.2@3125,1100 3195,1100 ; C4.2@3110.86,1085.86 ccw(c3076.72,1051.72) 3076.72,1100 ccw(c3076.72,1148.28) C4.2@3110.86,1114.14 ; C4.2@3139.14,1085.86 cw(c3173.28,1051.72) 3173.28,1100 cw(c3173.28,1148.28) C4.2@3139.14,1114.14 ; v1@3179.39,1040.61 ccw(c3153.79,1066.21) 3190,1066.21 ccw(c3226.21,1066.21) v1@3200.61,1040.61 ; v1(3190,1030) 3190,1095 3195,1100 ; C32.2@3219,1088 ccw(c3195,1070) 3195,1100 ; C32.2@3219,1112 cw(c3195,1130) 3195,1100 ; C32.2@3235,1100 3195,1100
BOOT0: P7.4 R6.2 R9.1 U7.94 | length 4371.5
  Top Layer w10: R9.1@903.33,2875 v1(903.33,2950) R6.2@903.33,3020 ; U7.94@2319.65,1791.93 2133.53,1791.93 1955,1970.46 1955,2330 1880,2405 1880,2750 v1(1800,2830) 1800,2950 v1(2410,3560)
  Bottom Layer w10: v1(903.33,2950) 983.33,3030 1240,3030 1335,2935 1695,2935 v1(1800,2830) ; v1@903.33,2965 ccw(c903.33,3001.21) 928.94,2975.61 ccw(c954.55,2950) v1@918.33,2950 ; v1@1785,2830 ccw(c1748.79,2830) 1774.39,2855.61 ccw(c1800,2881.21) v1@1800,2845 ; v1@2399.39,3570.61 ccw(c2373.79,3596.21) 2410,3596.21 ccw(c2446.21,3596.21) v1@2420.61,3570.61 ; v1(2410,3560) 2410,3605 2458,3653 2663.24,3653 2714.5,3704.26 2714.5,3752.5 2715,3753 2715,3788.15 ; P7.4@2732.51,3832.31 cw(c2672.66,3830.49) 2715,3788.15 ; P7.4@2742.51,3832.62 cw(c2704.42,3831.46) 2731.37,3804.51 cw(c2758.31,3777.57) P7.4@2759.47,3815.66 ; P7.4@2759.16,3805.66 ccw(c2757.34,3745.81) 2715,3788.15 ; P7.4@2760,3833.15 2715,3788.15
EARTH: U14.8 U14.13 U14.14 | length 1425.5
  Bottom Layer w20: U14.14@403.61,1363.32 ccw(c335.32,1431.61) 431.89,1431.61 ccw(c528.46,1431.61) U14.14@460.17,1363.32 ; U14.13@403.61,1916.76 cw(c335.32,1848.47) 431.89,1848.47 cw(c528.46,1848.47) U14.13@460.17,1916.76 ; U14.13@431.89,1945.04 U14.14@431.89,1335.04 526.89,1335.04 ; U14.14@460.5,1307.09 cw(c526.88,1242.24) 526.88,1335.04 ; U14.14@460.5,1362.99 ccw(c526.88,1427.84) 526.88,1335.04 ; U14.8@634.39,1465.04 cw(c580.07,1465.04) 618.48,1426.63 cw(c656.89,1388.22) U14.8@656.89,1442.54 ; U14.8@656.89,1465.04 526.89,1335.04
ETH_CS: U4.9 U7.4 | length 1759.3
  Top Layer w10: U4.9@1230.03,1889.62 ccw(c1218.4,1901.25) 1234.84,1901.25 ccw(c1251.29,1901.25) U4.9@1239.66,1889.62 ; U4.9@1234.84,1857.24 v1(1234.84,1924.84) ; v1(1620,1970) 1685.46,1970 2015.46,1640 2203.63,1640 2313.27,1530.36 2402.58,1530.36 2439.72,1567.5 U7.4@2439.72,1612.8 ; v1@1630.61,1959.39 cw(c1656.21,1933.79) 1656.21,1970 cw(c1656.21,2006.21) v1@1630.61,1980.61
  Bottom Layer w10: v1(1234.84,1924.84) 1295.16,1924.84 1330,1890 1540,1890 v1(1620,1970) ; v1@1245.45,1914.24 cw(c1271.06,1888.63) 1271.06,1924.84 cw(c1271.06,1961.06) v1@1245.45,1935.45 ; v1@1605,1970 cw(c1568.79,1970) 1594.39,1944.39 cw(c1620,1918.79) v1@1620,1955
ETH_INT: U4.4 U7.2 | length 1286.3
  Top Layer w10: U4.4@1484.84,1857.24 1484.84,1910 1495,1920.16 1495,1980 1536,2021 1685.37,2021 2030.37,1676 2218.54,1676 2328.18,1566.36 2387.67,1566.36 2400.35,1579.04 U7.2@2400.35,1612.8 ; 2395.82,1574.51 ccw(c2387.07,1583.27) U7.2@2399.45,1583.27
ETH_RST: U4.10 U7.3 | length 1862.9
  Top Layer w10: U4.10@1184.84,1857.24 1184.84,1944.84 ; v1@1186.4,1953.67 cw(c1179.32,1950.37) 1184.84,1944.84 ; v1@1193.67,1946.4 ccw(c1190.37,1939.32) 1184.84,1944.84 ; v1(1200,1960) 1184.84,1944.84 ; v1@1560,1960 v1(1560,1975) 1562,1977 1580.33,1977 ; v1@1560.96,1979.91 ccw(c1567.79,2014.96) 1593.04,1989.71 ; v1@1562.87,1989.72 ccw(c1572.12,2037.2) 1606.33,2003 ; v1@1573.62,1981.29 ccw(c1580.33,1984.4) 1580.33,1977 ; v1@1574.76,1972.34 cw(c1580.33,1971.34) 1580.33,1977 ; U7.3@2420.04,1612.8 2420.04,1573.27 2395.13,1548.36 2320.73,1548.36 2211.09,1658 2022.91,1658 1677.91,2003 1606.33,2003 ; 1580.33,1977 1606.33,2003
  Bottom Layer w10: v1(1200,1960) 1297,1960 1335,1922 1507,1922 v1(1560,1975) ; v1@1210.61,1949.39 cw(c1236.21,1923.79) 1236.21,1960 cw(c1236.21,1996.21) v1@1210.61,1970.61 ; v1@1545,1975 cw(c1508.79,1975) 1534.39,1949.39 cw(c1560,1923.79) v1@1560,1960
ETH_WOL: U4.5 U7.1 | length 1249.2
  Top Layer w10: U4.5@1434.84,1857.24 1434.84,1910 1477,1952.16 1477,1987.46 1528.54,2039 1692.82,2039 2036.82,1695 2225,1695 2307.2,1612.8 U7.1@2380.67,1612.8
GND: BAT1.2 C1.1 C2.1 C3.2 C5.2 C7.1 C8.1 C9.2 C10.1 C11.1 C14.2 C15.1 C16.1 C17.1 C18.1 C19.1 C20.1 C21.1 C22.1 C23.1 C24.1 C25.2 C27.2 C29.1 C30.2 C31.2 C34.1 C35.1 C36.1 C37.1 C38.1 C44.2 C45.2 C46.1 C47.1 C48.1 C49.1 C50.1 J4.4 J4.5 J4.6 L7.1 P1.1 P1.2 P2.5 P3.10 P3.12 P3.14 P3.16 P3.21 P3.23 P3.25 P3.27 P7.1 P18.15 P18.16 pad.0 pad.1 pad.2 pad.3 pad.4 pad.5 pad.6 pad.7 pad.8 pad.9 pad.10 pad.11 pad.12 pad.13 pad.14 pad.15 pad.16 pad.17 pad.18 pad.19 Q1.2 Q2.2 Q3.2 R9.2 R10.2 R12.1 R16.1 R20.2 R22.2 R23.2 R44.1 T2.2 U1.3 U2.2 U3.21 U3.22 U3.23 U3.24 U3.25 U3.42 U4.2 U4.11 U4.18 U4.21 U4.22 U5.6 U7.10 U7.27 U7.49 U7.74 U7.99 U9.4 U10.1 U14.10 U14.11 | length 16111.6
  Top Layer w10: U7.99@2319.65,1693.5 2368.5,1693.5 2415,1740 ; U7.74@2400.35,2207.28 2400.35,2159.65 2415,2145 2485,2145 2610,2020 v1(2830,2020) 2850,2040 ; v1@2404.39,1774.39 cw(c2378.79,1748.79) 2415,1748.79 cw(c2451.21,1748.79) v1@2425.61,1774.39 ; v1(2415,1785) 2415,1740 ; U7.10@2557.83,1612.8 2557.83,1657.17 2475,1740 2415,1740 ; v1@2819.39,2009.39 ccw(c2793.79,1983.79) 2793.79,2020 ccw(c2793.79,2056.21) v1@2819.39,2030.61 ; v1@2832.83,2034.73 ccw(c2836.45,2053.55) 2850,2040 ; v1@2844.73,2022.83 cw(c2863.55,2026.45) 2850,2040 ; U7.27@2914.13,1693.5 v1(3001.5,1693.5) ; U7.49@2914.13,2126.57 2871.57,2126.57 2850,2105 2850,2040 ; v1@2990.89,1682.9 ccw(c2965.28,1657.29) 2965.28,1693.5 ccw(c2965.28,1729.72) v1@2990.89,1704.11 ; U3.42@3793.04,2289.08 3793.04,2363.04 3810,2380 4005,2380 4029.26,2404.26 U3.21@4029.26,2470.19 4029.26,2534.26 4035,2540 ; 4040,2545 4048.95,2536.05 U3.22@4048.95,2470.19 ; U3.23@4068.63,2470.19 4068.63,2543.63 ; U3.24@4088.32,2470.19 4088.32,2543.32 ; U3.25@4108,2470.19 4108,2544.5
  Top Layer w16: U5.6@5024.39,477.68 5024.39,402.54 5041.93,385 5120,385 R44.1@5175,440 ; 5137.44,402.44 cw(c5175,364.89) R44.1@5175,418 ; 5149.51,414.51 ccw(c5129.03,435) R44.1@5158,435
  Top Layer w20: v1(590,975) 595,980 U2.2@654.76,980 ; v1@597.07,967.93 cw(c626.21,938.79) 626.21,980 ; R12.1@705,465 R12.1@715,455 ; v1(795,2090) 810.04,2105.04 ; v1@795.93,2099.96 ccw(c797.58,2117.5) 810.04,2105.04 ; R20.2@800,2785 R9.2@903.33,2785 ; v1@804.96,2090.93 cw(c822.5,2092.58) 810.04,2105.04 ; R20.2@810.61,2774.39 cw(c836.21,2748.79) 836.21,2785 cw(c836.21,2821.21) R20.2@810.61,2795.61 ; 850,2780 R10.2@1090,2780 ; R9.2@892.73,2769.39 ccw(c867.12,2743.79) 867.12,2780 ccw(c867.12,2816.21) R9.2@892.73,2790.61 ; R9.2@892.73,2774.39 ccw(c867.12,2748.79) 867.12,2785 ccw(c867.12,2821.21) R9.2@892.73,2795.61 ; R9.2@913.94,2769.39 cw(c939.55,2743.79) 939.55,2780 cw(c939.55,2816.21) R9.2@913.94,2790.61 ; R22.2@996.06,2769.39 ccw(c970.45,2743.79) 970.45,2780 ccw(c970.45,2816.21) R22.2@996.06,2790.61 ; R22.2@1017.27,2769.39 cw(c1042.88,2743.79) 1042.88,2780 cw(c1042.88,2816.21) R22.2@1017.27,2790.61 ; R10.2@1099.39,2769.39 ccw(c1073.79,2743.79) 1073.79,2780 ccw(c1073.79,2816.21) R10.2@1099.39,2790.61 ; U4.18@1134.84,1502.91 U4.11@1134.84,1857.24 1134.84,1969.84 1220.04,2055.04 C11.1@1225.89,2055.04 ; 1181.76,2016.76 cw(c1225.89,1972.63) C11.1@1225.89,2035.04 ; C20.1@1196.39,1280.21 C19.1@1291.64,1280.21 1386.06,1280.21 C9.2@1386.89,1281.04 ; C20.1@1207,1269.6 cw(c1232.6,1244) 1232.6,1280.21 cw(c1232.6,1316.42) C20.1@1207,1290.82 ; C19.1@1281.03,1269.6 ccw(c1255.43,1244) 1255.43,1280.21 ccw(c1255.43,1316.42) C19.1@1281.03,1290.82 ; U4.21@1284.84,1502.91 1284.84,1554.84 v1(1310,1580) 1334.84,1555.16 U4.22@1334.84,1502.91 ; v1@1300,1580 cw(c1275.86,1580) 1292.93,1562.93 cw(c1310,1545.86) 1310,1570 cw(c1310,1545.86) 1327.07,1562.93 cw(c1344.14,1580) v1@1320,1580 ; C19.1@1302.25,1269.6 cw(c1327.85,1244) 1327.85,1280.21 cw(c1327.85,1316.42) C19.1@1302.25,1290.82 ; 1348.68,1280.21 ccw(c1348.68,1319.25) C9.2@1376.28,1291.65 ; 1352.68,1280.21 cw(c1352.68,1246.83) C9.2@1376.28,1270.43 ; C14.2@1521.89,1280.04 1631.06,1280.04 C17.1@1631.89,1279.21 ; C14.2@1532.5,1269.43 cw(c1558.1,1243.83) 1558.1,1280.04 cw(c1558.1,1316.25) C14.2@1532.5,1290.65 ; C29.1@1565,2345 v1(1565,2415) ; U4.2@1584.84,1857.24 1584.84,1735.16 1695,1625 ; 1593.68,1280.04 cw(c1593.68,1241) C17.1@1621.28,1268.6 ; 1597.68,1280.04 ccw(c1597.68,1313.42) C17.1@1621.28,1289.82 ; C15.1@1725.15,1611.6 ccw(c1695,1584.38) 1695,1625 ; C15.1@1725.15,1638.4 cw(c1695,1665.62) 1695,1625 ; C15.1@1740,1625 1695,1625 ; v2(2730,2995) v2@2735,3000
  Top Layer w30: 810.04,2105.04 850.04,2145.04 R16.1@943.89,2145.04 ; 4035,2540 4040,2545 4175,2545 v1(4210,2510) ; P3.21@4060,140 P3.23@4160,140 P3.25@4260,140 P3.27@4360,140 4445,55 4530,55 4570,95 4570,450 ; P3.21@4070.27,129.73 cw(c4095.07,104.93) 4095.07,140 cw(c4095.07,175.07) P3.21@4070.27,150.27 ; P3.23@4149.73,129.73 ccw(c4124.93,104.93) 4124.93,140 ccw(c4124.93,175.07) P3.23@4149.73,150.27 ; P3.23@4170.27,129.73 cw(c4195.07,104.93) 4195.07,140 cw(c4195.07,175.07) P3.23@4170.27,150.27 ; P3.25@4249.73,129.73 ccw(c4224.93,104.93) 4224.93,140 ccw(c4224.93,175.07) P3.25@4249.73,150.27 ; P3.25@4270.27,129.73 cw(c4295.07,104.93) 4295.07,140 cw(c4295.07,175.07) P3.25@4270.27,150.27 ; P3.27@4349.73,129.73 ccw(c4324.93,104.93) 4324.93,140 ccw(c4324.93,175.07) P3.27@4349.73,150.27 ; P3.27@4360,125.47 cw(c4360,90.4) 4384.8,115.2 cw(c4409.6,140) P3.27@4374.53,140 ; C25.2@4505,500 4565,500 4570,505 ; C25.2@4516.31,488.69 cw(c4543.63,461.37) 4543.63,500 cw(c4543.63,538.63) C25.2@4516.31,511.31 ; C21.1@4520,730 cw(c4520,693.79) 4545.61,719.39 ; C21.1@4520,745 C21.1@4540,725 ; C21.1@4527.07,747.07 ccw(c4580.36,800.36) 4580.36,725 ; C22.1@4689.39,439.39 ccw(c4663.79,413.79) 4663.79,450 ccw(c4663.79,486.21) C22.1@4689.39,460.61 ; C24.1@4705,725 C21.1@4540,725 ; C22.1@4710.61,439.39 cw(c4736.21,413.79) 4736.21,450 cw(c4736.21,486.21) C22.1@4710.61,460.61 ; 4779.39,474.39 cw(c4805,448.79) C23.1@4805,485 ; C23.1@4805,500 4755,450 C22.1@4700,450 4570,450 ; C49.1@4809.39,1185.04 C49.1@4819.71,1174.71 ; C47.1@5024.39,1185.04 C47.1@5034.71,1174.71 ; C21.1@4540,725 4570,695 4570,505 ; 4570,450 4570,505
  Top Layer w50: v2@2735,3000 v2(2735,3120) ; v1(4210,2510) 4210,2340 C5.2@4525,2025 ; C49.1@4819.71,1174.71 4859.39,1135.04 C46.1@5131.89,1135.04 ; C48.1@4915.75,1135.04 ccw(c4915.75,1288.68) 5024.39,1180.04 ccw(c5131.88,1285.93) C46.1@5131.89,1135.04 ; U1.3@5505,1990 cw(c5420.5,1990) 5480.25,1930.25 cw(c5540,1870.5) U1.3@5540,1955 ; U1.3@5540,1990 5425,1875 C44.2@5425,1570 5425,1140 5375,1090 5260,1090 5214.96,1135.04 C46.1@5131.89,1135.04
  Bottom Layer w10: C37.1@2745,2015 2825,2015 v1(2830,2020) ; C37.1@2759.14,2000.86 cw(c2793.28,1966.72) 2793.28,2015 cw(c2793.28,2063.28) C37.1@2759.14,2029.14 ; 2781.72,2015 ccw(c2781.72,2068.28) v1@2819.39,2030.61 ; v1@2819.39,2009.39 ccw(c2805.86,1995.86) 2805.86,2015 ccw(c2805.86,2044.14) v1@2826.46,2023.54 ; P3.10@3460,240 P3.12@3560,240 P3.14@3660,240 P3.16@3760,240 3810,190 3810,110 3845,75 3995,75 P3.21@4060,140 ; P3.10@3470.27,229.73 cw(c3495.07,204.93) 3495.07,240 cw(c3495.07,275.07) P3.10@3470.27,250.27 ; P3.10@3477.34,222.66 cw(c3519.21,180.79) 3519.21,240 cw(c3519.21,299.21) P3.10@3477.34,257.34 ; P3.12@3542.66,222.66 ccw(c3500.79,180.79) 3500.79,240 ccw(c3500.79,299.21) P3.12@3542.66,257.34 ; P3.12@3549.73,229.73 ccw(c3524.93,204.93) 3524.93,240 ccw(c3524.93,275.07) P3.12@3549.73,250.27 ; P3.12@3570.27,229.73 cw(c3595.07,204.93) 3595.07,240 cw(c3595.07,275.07) P3.12@3570.27,250.27 ; P3.12@3577.34,222.66 cw(c3619.21,180.79) 3619.21,240 cw(c3619.21,299.21) P3.12@3577.34,257.34 ; P3.14@3642.66,222.66 ccw(c3600.79,180.79) 3600.79,240 ccw(c3600.79,299.21) P3.14@3642.66,257.34 ; P3.14@3649.73,229.73 ccw(c3624.93,204.93) 3624.93,240 ccw(c3624.93,275.07) P3.14@3649.73,250.27 ; P3.14@3670.27,229.73 cw(c3695.07,204.93) 3695.07,240 cw(c3695.07,275.07) P3.14@3670.27,250.27 ; P3.14@3677.34,222.66 cw(c3719.21,180.79) 3719.21,240 cw(c3719.21,299.21) P3.14@3677.34,257.34 ; P3.16@3742.66,222.66 ccw(c3700.79,180.79) 3700.79,240 ccw(c3700.79,299.21) P3.16@3742.66,257.34 ; P3.16@3749.73,229.73 ccw(c3724.93,204.93) 3724.93,240 ccw(c3724.93,275.07) P3.16@3749.73,250.27 ; P3.16@3760,215.47 cw(c3760,156.26) 3801.87,198.13 cw(c3843.74,240) P3.16@3784.53,240 ; P3.16@3760,225.47 cw(c3760,190.4) 3784.8,215.2 cw(c3809.6,240) P3.16@3774.53,240 ; Q3.2@3802.4,2882.6 3859.8,2940 4060,2940 ; Q3.2@3802.4,2883.19 ccw(c3802.4,2884.61) Q3.2@3803.41,2883.61 ; Q3.2@3802.4,2893.19 ccw(c3802.4,2918.76) 3820.48,2900.68 ; Q3.2@3802.4,2903.19 ccw(c3802.4,2952.9) 3837.55,2917.75 ; P3.21@4035.47,140 cw(c3976.26,140) 4018.13,98.13 cw(c4060,56.26) P3.21@4060,115.47 ; P3.21@4045.47,140 cw(c4010.4,140) 4035.2,115.2 cw(c4060,90.4) P3.21@4060,125.47 ; Q2.2@4050.18,2901.19 ccw(c4038.56,2912.82) 4055,2912.82 ccw(c4071.44,2912.82) Q2.2@4059.82,2901.19 ; Q2.2@4055,2882.6 4055,2935 4060,2940 ; Q1.2@4307.59,2901.27 ccw(c4295.96,2912.9) 4312.4,2912.9 ccw(c4328.84,2912.9) Q1.2@4317.22,2901.27 ; Q1.2@4312.4,2882.68 4312.4,2922.6 4295,2940 4060,2940
  Bottom Layer w20: U14.10@99.47,1800.08 ccw(c45.15,1800.08) 83.56,1838.49 ccw(c121.97,1876.9) U14.10@121.97,1822.58 ; U14.11@106.06,1495.99 ccw(c67.65,1534.4) 121.97,1534.4 ccw(c176.29,1534.4) U14.11@137.88,1495.99 ; U14.10@106.06,1784.17 cw(c67.65,1745.76) 121.97,1745.76 cw(c176.29,1745.76) U14.10@137.88,1784.17 ; U14.11@121.97,1480.08 U14.10@121.97,1800.08 65,1857.05 65,1940 215,2090 v1(795,2090) ; J4.4@369.29,838.61 cw(c344.13,808.78) 383.15,808.78 ; J4.4@383.15,855.04 383.15,808.78 ; J4.4@397.01,838.61 ccw(c422.17,808.78) 383.15,808.78 ; v1@582.93,967.93 cw(c565.86,950.86) 590,950.86 cw(c614.14,950.86) v1@597.07,967.93 ; v1(590,975) 590,865.04 505,780.04 411.89,780.04 383.15,808.78 ; v1@787.93,2082.93 ccw(c770.86,2065.86) 770.86,2090 ccw(c770.86,2114.14) v1@787.93,2097.07
  Bottom Layer w30: C8.1@4145,2415 4145,2445 v1(4210,2510) 4240,2480 C7.1@4240,2415 ; C8.1@4155,2420 cw(c4239.5,2420) 4179.75,2479.75
  other v2: 535,65 920,70 2540,85 2895,85 5625,525 2850,575 2550,580 3050,935 2800,940 1295,945 2350,945 4955,945 1655,950 4255,975 5625,1065 2035,1320 5630,1515 4135,1650 4290,1665 2435,1900 2575,1900 2785,1910 4920,2105 5345,2110 5640,2110 3085,2125 4515,2210 1755,2230 3260,2270 995,2325 3090,2465 1005,2485 4485,2495 2465,2630 2435,2955 2540,2955 3055,3105 3595,3130 4035,3135 1380,3300 3270,3840 1960,3850 550,3880
  other v4: 141.89,480.04 146.89,915.04 1226.89,1115.04 2366.89,1120.04
  other v5: 2561.89,1005.04
GND_24V: C42.2 C43.2 D7.1 P6.1 U1.2 | length 2562.5
  Top Layer w50: U1.2@5205.41,2784.63 cw(c5010.61,2754.4) 5150.01,2615.01 ; U1.2@5215.25,2765.25 cw(c5155.5,2705.5) 5240,2705.5 cw(c5324.5,2705.5) U1.2@5264.75,2765.25 ; 5219.66,2684.66 ccw(c5131.21,2773.12) U1.2@5254.82,2792.3 ; U1.2@5240,2790 5240,2705 5150,2615 ; P6.1@5451.72,3261.72 ccw(c5383.43,3193.43) 5383.43,3290 ccw(c5383.43,3386.57) P6.1@5451.72,3318.28 ; P6.1@5480,3290 5325.91,3290 D7.1@5190,3425.91 4895.91,3425.91 4795,3325 C42.2@4795,3230 C43.2@4795,3030 4795,2760 4940,2615 5150,2615
GSM_BATT: C5.1 C7.2 C8.2 D1.2 D2.1 U3.26 U3.27 U3.28 U3.29 U3.30 | length 3349.1
  Top Layer w10: U3.30@4029.26,2289.08 4029.26,2225.74 4040,2215 4048.95,2223.95 U3.29@4048.95,2289.08 ; 4068.63,2206.37 U3.28@4068.63,2289.08 ; U3.27@4088.32,2289.08 4088.32,2206.68 4090,2205 ; U3.26@4108,2289.08 4108,2207 4110,2205 ; 4325,2075 4325,2085 ; v1(4475,3385) 4570,3480 D2.1@4610,3480
  Top Layer w30: 4040,2215 4050,2205 4090,2205 4110,2205 v1(4180,2205) 4195,2205 4325,2075 4325,2060 ; v1@4180,2200 cw(c4180,2151.72) 4214.14,2185.86 ; C5.1@4313.69,2036.31 ccw(c4286.37,2063.63) 4325,2063.63 ccw(c4363.63,2063.63) C5.1@4336.31,2036.31 ; C5.1@4325,2020 C5.1@4325,2025 4325,2060 ; 4325,2060 cw(c4294.72,2060) 4314.53,2037.1 ccw(c4294.72,2060) 4325,2060 ; 4325,2060 ccw(c4355.28,2060) 4335.47,2037.1 cw(c4355.28,2060) 4325,2060
  Top Layer w50: v1(4180,2205) 4325,2060 ; C5.1@4325,2020 4325,1850 D1.2@4415,1760
  Bottom Layer w10: C7.2@4240,2320 4245,2320 4315,2390 4315,2480 4475,2640 v1(4475,3385) ; C7.2@4240,2330 ccw(c4240,2366.21) 4265.61,2340.61 ; C7.2@4240,2340 ccw(c4240,2400.36) 4282.68,2357.68 ; C7.2@4240,2350 ccw(c4240,2434.5) 4299.75,2374.75 ; C7.2@4260,2330 cw(c4272.07,2330) C7.2@4263.54,2338.54 ; v1@4464.39,3374.39 cw(c4438.79,3348.79) 4475,3348.79 cw(c4511.21,3348.79) v1@4485.61,3374.39
  Bottom Layer w30: C8.2@4145,2325 4145,2240 v1(4180,2205) 4240,2265 4240,2320 C7.2@4240,2325
LCD_VDD: C25.1 C50.2 L2.1 P3.1 P3.2 P3.22 P3.24 P3.26 P3.28 R19.1 R25.1 R26.1 R28.1 R34.1 R36.1 R37.1 R38.1 R59.1 R60.1 R61.1 R65.1 R66.1 R67.1 | length 7823.1
  Top Layer w10: R60.1@3075.86,614.14 ccw(c3041.72,648.28) 3090,648.28 ccw(c3138.28,648.28) R60.1@3104.14,614.14 ; v1@3079.39,664.39 cw(c3053.79,638.79) 3090,638.79 cw(c3126.21,638.79) v1@3100.61,664.39 ; R60.1@3090,595 v1(3090,675) ; R19.1@3172.01,614.14 ccw(c3137.87,648.28) 3186.15,648.28 ccw(c3234.44,648.28) R19.1@3200.3,614.14 ; v1@3175.55,663.24 cw(c3149.94,637.63) 3186.15,637.63 cw(c3222.37,637.63) v1@3196.76,663.24 ; R19.1@3186.15,595 v1(3186.15,673.85) ; R59.1@3268.17,614.14 ccw(c3234.02,648.28) 3282.31,648.28 ccw(c3330.59,648.28) R59.1@3296.45,614.14 ; v1@3271.7,662.09 cw(c3246.09,636.48) 3282.31,636.48 cw(c3318.52,636.48) v1@3292.91,662.09 ; R59.1@3282.31,595 v1(3282.31,672.69) ; R61.1@3364.32,614.14 ccw(c3330.18,648.28) 3378.46,648.28 ccw(c3426.75,648.28) R61.1@3392.6,614.14 ; v1@3367.85,663.43 cw(c3342.25,637.83) 3378.46,637.83 cw(c3414.67,637.83) v1@3389.07,663.43 ; R61.1@3378.46,595 v1(3378.46,674.04) ; R38.1@3460.47,614.14 ccw(c3426.33,648.28) 3474.62,648.28 ccw(c3522.9,648.28) R38.1@3488.76,614.14 ; v1@3464.01,664.01 cw(c3438.4,638.4) 3474.62,638.4 cw(c3510.83,638.4) v1@3485.22,664.01 ; R38.1@3474.62,595 v1(3474.62,674.62) ; R65.1@3556.63,614.14 ccw(c3522.48,648.28) 3570.77,648.28 ccw(c3619.05,648.28) R65.1@3584.91,614.14 ; v1@3560.16,663.62 cw(c3534.56,638.02) 3570.77,638.02 cw(c3606.98,638.02) v1@3581.38,663.62 ; R65.1@3570.77,595 v1(3570.77,674.23) ; R37.1@3652.78,614.14 ccw(c3618.64,648.28) 3666.92,648.28 ccw(c3715.21,648.28) R37.1@3681.06,614.14 ; v1@3654.39,659.39 cw(c3624.14,629.14) 3666.92,629.14 ; v1(3665,670) 3666.92,668.08 R37.1@3666.92,595 ; 3666.92,638.43 cw(c3696.57,638.43) v1@3675.61,659.39 ; R36.1@3748.93,614.14 ccw(c3714.79,648.28) 3763.08,648.28 ccw(c3811.36,648.28) R36.1@3777.22,614.14 ; v1@3752.47,662.47 cw(c3726.86,636.86) 3763.08,636.86 cw(c3799.29,636.86) v1@3773.68,662.47 ; R36.1@3763.08,595 v1(3763.08,673.08) ; R34.1@3845.09,614.14 ccw(c3810.95,648.28) 3859.23,648.28 ccw(c3907.51,648.28) R34.1@3873.37,614.14 ; v1@3848.62,663.62 cw(c3823.02,638.02) 3859.23,638.02 cw(c3895.44,638.02) v1@3869.84,663.62 ; R34.1@3859.23,595 v1(3859.23,674.23) ; R28.1@3941.24,614.14 ccw(c3907.1,648.28) 3955.38,648.28 ccw(c4003.67,648.28) R28.1@3969.53,614.14 ; v1@3944.78,664.01 cw(c3919.17,638.4) 3955.38,638.4 cw(c3991.6,638.4) v1@3965.99,664.01 ; R28.1@3955.38,595 v1(3955.38,674.62) ; R26.1@4037.4,614.14 ccw(c4003.25,648.28) 4051.54,648.28 ccw(c4099.82,648.28) R26.1@4065.68,614.14 ; v1@4039.39,654.39 cw(c4010.07,625.07) 4051.54,625.07 ; v1@4041.04,652.97 cw(c4030.28,638.53) 4047.67,633.87 ; v1@4042.5,652.01 cw(c4029.24,629.05) 4054.85,635.91 ; 4049.87,642.07 cw(c4065.68,637.83) v1@4057.5,652.01 ; v1(4050,665) 4051.54,663.46 R26.1@4051.54,595 ; 4051.54,632.5 cw(c4082.5,632.5) v1@4060.61,654.39 ; 4056.73,628.9 cw(c4087.16,637.05) v1@4061.99,655.98 ; R66.1@4133.55,614.14 ccw(c4099.41,648.28) 4147.69,648.28 ccw(c4195.98,648.28) R66.1@4161.83,614.14 ; v1@4137.09,661.7 cw(c4111.48,636.09) 4147.69,636.09 cw(c4183.9,636.09) v1@4158.3,661.7 ; R66.1@4147.69,595 v1(4147.69,672.31)
  Top Layer w40: P3.1@3060,140 P3.2@3060,240 ; P3.28@4360,240 4360,405 4410,455 4410,595 ; 4368.79,740 ccw(c4368.79,781.21) L2.1@4397.93,752.07 ; L2.1@4405,745 4400,740 C50.2@4290,740 4240,690 v1(4240,675) 4240,598.85 R25.1@4243.85,595 R67.1@4340,595 4410,595 ; C25.1@4505,600 4500,595 4410,595
  Bottom Layer w10: v1(3090,675) v1@3665,675 ; v1@3100.61,664.39 cw(c3126.21,638.79) 3126.21,675 cw(c3126.21,711.21) v1@3100.61,685.61 ; 3147.16,675 cw(c3147.16,634.85) v1@3175.55,663.24 ; 3152.73,675 ccw(c3152.73,707.27) v1@3175.55,684.45 ; v1@3196.76,663.24 cw(c3225.15,634.85) 3225.15,675 ; v1@3196.76,684.45 ccw(c3219.58,707.27) 3219.58,675 ; 3240.52,675 cw(c3240.52,630.91) v1@3271.7,662.09 ; 3251.67,675 ccw(c3251.67,703.33) v1@3271.7,683.3 ; v1@3292.91,662.09 cw(c3324.09,630.91) 3324.09,675 ; v1@3292.91,683.3 ccw(c3312.95,703.33) 3312.95,675 ; 3339.93,675 cw(c3339.93,635.5) v1@3367.85,663.43 ; 3344.57,675 ccw(c3344.57,707.93) v1@3367.85,684.65 ; v1@3389.07,663.43 cw(c3417,635.5) 3417,675 ; v1@3389.07,684.65 ccw(c3412.35,707.93) 3412.35,675 ; 3437.47,675 cw(c3437.47,637.47) v1@3464.01,664.01 ; 3439.33,675 ccw(c3439.33,709.9) v1@3464.01,685.22 ; v1@3485.22,664.01 cw(c3511.76,637.47) 3511.76,675 ; v1@3485.22,685.22 ccw(c3509.9,709.9) 3509.9,675 ; 3532.7,675 cw(c3532.7,636.16) v1@3560.16,663.62 ; 3536.41,675 ccw(c3536.41,708.59) v1@3560.16,684.84 ; v1@3581.38,663.62 cw(c3608.84,636.16) 3608.84,675 ; v1@3581.38,684.84 ccw(c3605.13,708.59) 3605.13,675 ; 3616.72,675 cw(c3616.72,621.72) v1@3654.39,659.39 ; v1@3654.39,680.61 cw(c3640.86,694.14) 3640.86,675 cw(c3640.86,645.86) v1@3661.46,666.46 ; v1(3665,670) v1@3665,675 ; v1@3668.54,666.46 cw(c3689.14,645.86) 3689.14,675 cw(c3689.14,694.14) v1@3675.61,680.61 ; v1@3675.61,659.39 cw(c3713.28,621.72) 3713.28,675 ; 3722.22,675 cw(c3722.22,632.22) v1@3752.47,662.47 ; 3731.51,675 ccw(c3731.51,704.65) v1@3752.47,683.68 ; v1@3773.68,662.47 cw(c3803.93,632.22) 3803.93,675 ; v1@3773.68,683.68 ccw(c3794.65,704.65) 3794.65,675 ; 3821.16,675 cw(c3821.16,636.16) v1@3848.62,663.62 ; 3824.88,675 ccw(c3824.88,708.59) v1@3848.62,684.84 ; v1@3869.84,663.62 cw(c3897.3,636.16) 3897.3,675 ; v1@3869.84,684.84 ccw(c3893.59,708.59) 3893.59,675 ; 3918.24,675 cw(c3918.24,637.48) v1@3944.78,664.01 ; 3920.1,675 ccw(c3920.1,709.9) v1@3944.78,685.22 ; v1@3965.99,664.01 cw(c3992.52,637.48) 3992.52,675 ; v1@3965.99,685.22 ccw(c3990.67,709.9) 3990.67,675 ; 3989.64,675 cw(c3989.64,604.64) v1@4039.39,654.39 ; 4013.79,675 cw(c4013.79,628.79) v1@4046.46,661.46 ; v1@4053.54,661.46 cw(c4086.21,628.79) 4086.21,675 ; v1@4060.61,654.39 cw(c4110.36,604.64) 4110.36,675 ; 4104.98,675 cw(c4104.98,629.6) v1@4137.09,661.7 ; 4117.98,675 ccw(c4117.98,702.02) v1@4137.09,682.91 ; v1(4147.69,672.31) v1@4145,675 ; v1@4158.3,661.7 cw(c4190.4,629.6) 4190.4,675 ; v1@4158.3,682.91 ccw(c4177.41,702.02) 4177.41,675 ; v1@4229.39,664.39 ccw(c4203.79,638.79) 4203.79,675 ccw(c4203.79,711.21) v1@4229.39,685.61 ; v1(4240,675) v1@4145,675 ; v1@3665,675 v1@4145,675
  Bottom Layer w40: P3.2@3060,240 3060,285 3120,345 3955,345 P3.22@4060,240 P3.24@4160,240 P3.26@4260,240 P3.28@4360,240 ; P3.2@3069.53,240 cw(c3201.17,240) 3108.08,333.08
NC: U1.4
NetBAT1_1: BAT1.1 D4.1 | length 472
  Top Layer w10: D4.1@1235,2925 1410,2925 BAT1.1@1620,2715